# EAGLE board Evap-Lite V2.2 (EAGLE 9.5.2)
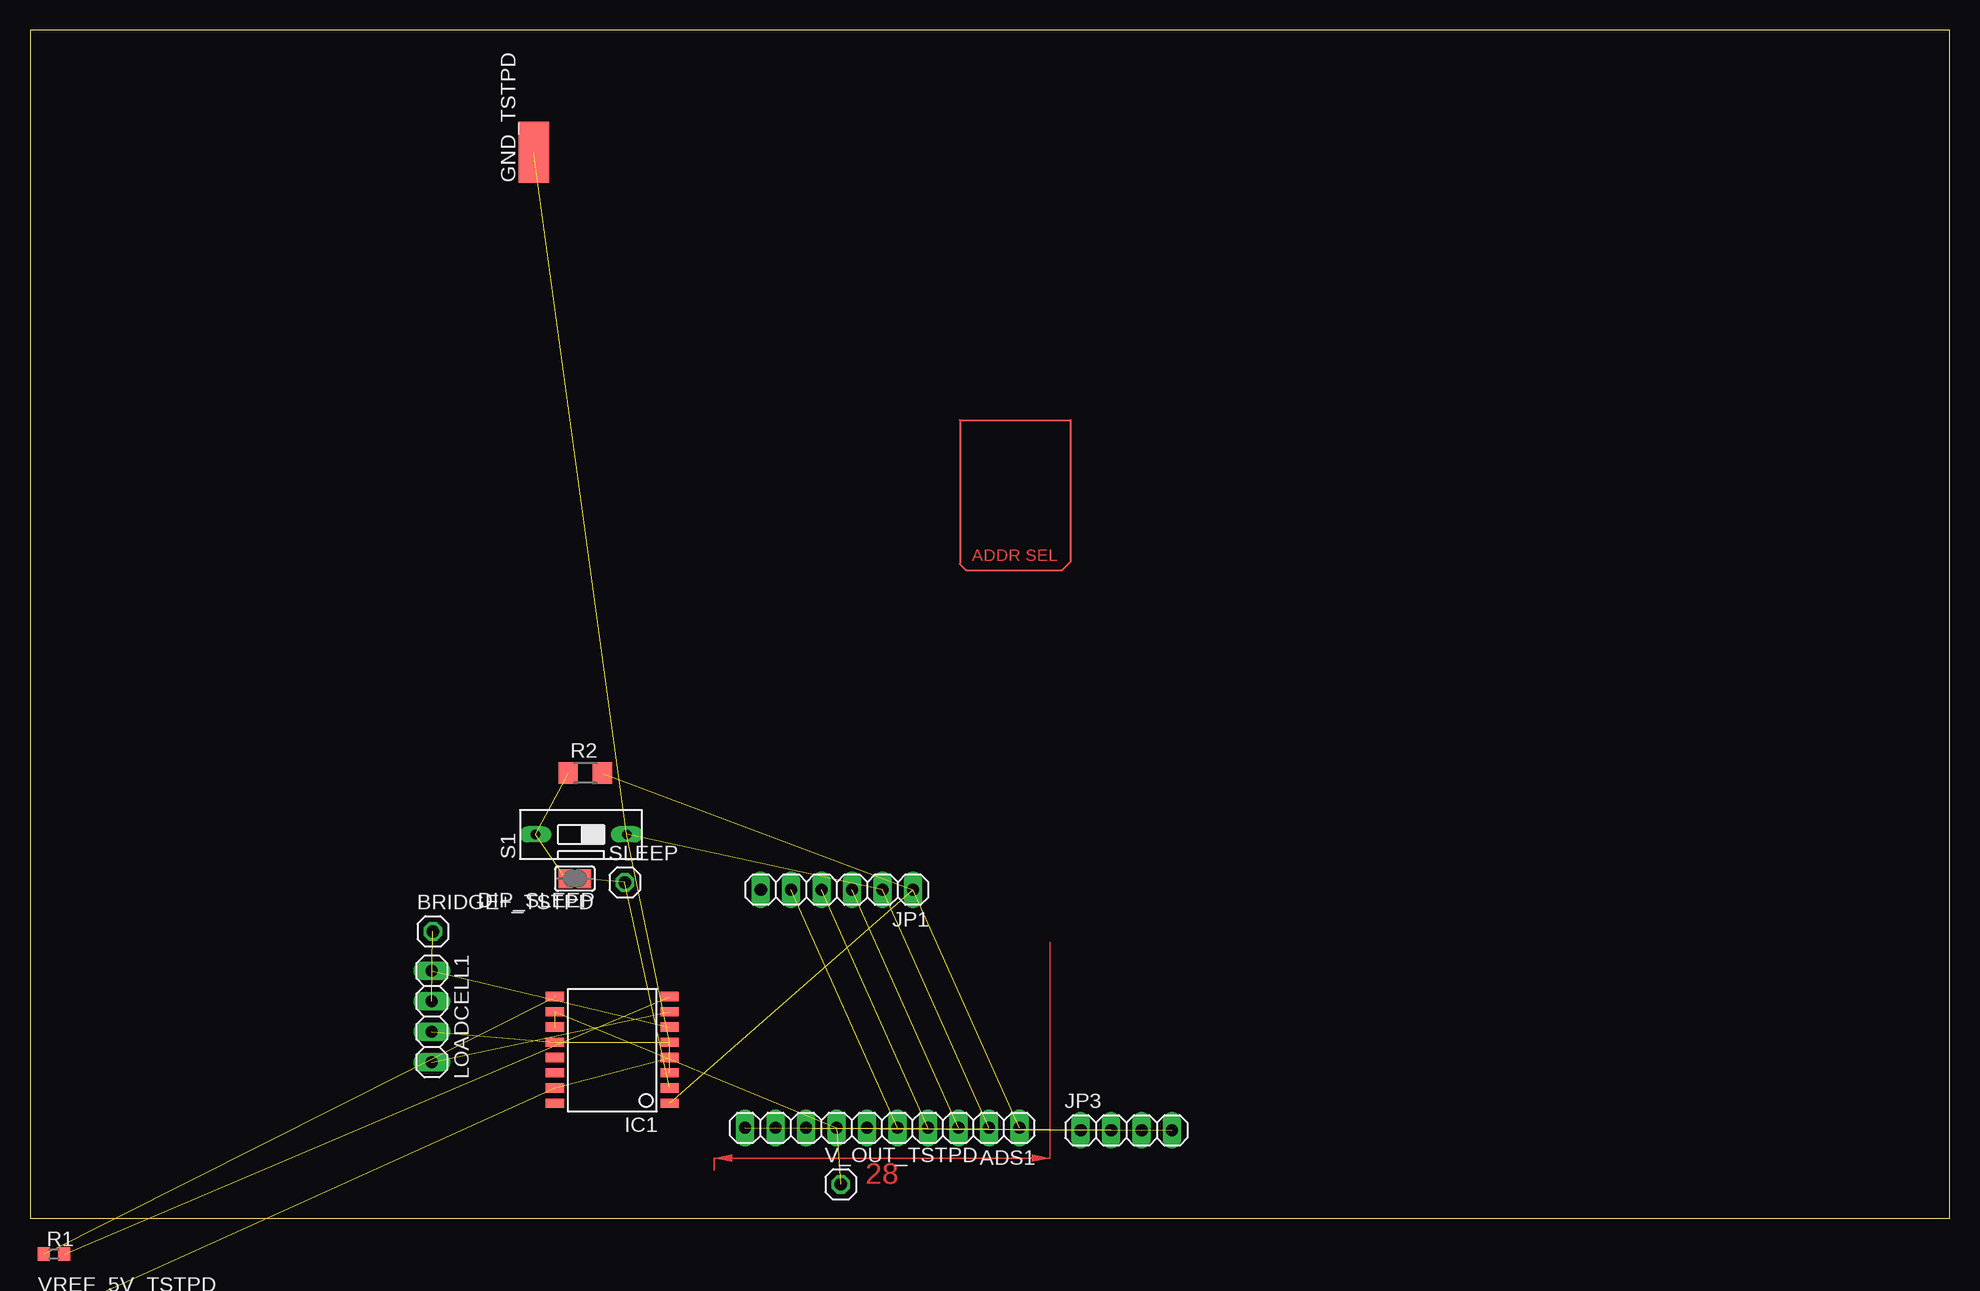
[diagram p0: board, top side]

Size 160 x 99 mm. Coordinates in mm from the lower left corner, seen from the top.
Outline: 0,0 160,0 160,99 0,99 0,0
Copper layers (1*16): Top 0.035mm / dielectric 1.5mm / Bottom 0.035mm
Design rules "default": minimum track width 6mil, minimum drill 0.35mm, track to track 6mil, track to pad 6mil, pad to pad 6mil, via to via 6mil, smd to smd 6mil, copper to edge 40mil, drill to drill 6mil, minimum pad ring 10mil, minimum via ring 8mil, stop-mask expansion 4mil, vias tented up to drill 0mil, thermal gap 10mil

## Footprints (pad centres in the part's own frame; a part is rotated, then mirrored left to right if it is on the bottom)
1X10 = drill 1.016 long: 1 -11.43,0; 2 -8.89,0; 3 -6.35,0; 4 -3.81,0; 5 -1.27,0; 6 1.27,0; 7 3.81,0; 8 6.35,0; 9 8.89,0; 10 11.43,0
1X01 = drill 1.016 octagon: 1 0,0
SJ = smd 1.168 x 1.6: 1 -0.762,0; 2 0.762,0
SMD2,54-5,08 = smd 2.54 x 5.08: 1 0,0
SO16-1 = smd 0.762 x 1.524: 1 -4.445,-4.775; 2 -3.175,-4.775; 3 -1.905,-4.775; 4 -0.635,-4.775; 5 0.635,-4.775; 6 1.905,-4.775; 7 3.175,-4.775; 8 4.445,-4.775; 9 4.445,4.775; 10 3.175,4.775; 11 1.905,4.775; 12 0.635,4.775; 13 -0.635,4.775; 14 -1.905,4.775; 15 -3.175,4.775; 16 -4.445,4.775
1X06 = drill 1.016 long: 1 -6.35,0; 2 -3.81,0; 3 -1.27,0; 4 1.27,0; 5 3.81,0; 6 6.35,0
1X04 = drill 1.016 long: 1 -3.81,0; 2 -1.27,0; 3 1.27,0; 4 3.81,0
R0603 = smd 1 x 1.1: 1 -0.85,0; 2 0.85,0
R1206 = smd 1.6 x 1.803: 1 -1.422,0; 2 1.422,0
DS-01 = drill 0.813 long: 1 0,-3.81; 2 0,3.81

## Placement (x,y rotation side)
ADS1  [1X10]  71.04,7.51 180 top
BRIDGE+_TSTPD  [1X01]  33.58,23.88 0 top
DIP_SLEEP  [SJ]  45.42,28.28 180 top
GND_TSTPD  WIREPADSMD2,54-5,08  [SMD2,54-5,08]  41.98,88.81 0 top
IC1  INA125U  [SO16-1]  48.53,14.01 90 top
JP1  [1X06]  67.26,27.36 180 top
JP3  [1X04]  91.39,7.31 0 top
LOADCELL1  [1X04]  33.49,16.79 270 top
R1  [R0603]  2,-3 0 top
R2  [R1206]  46.28,37.07 0 top
S1  [DS-01]  45.93,31.96 90 top
SLEEP  [1X01]  49.58,27.96 0 top
V_OUT_TSTPD  [1X01]  67.58,2.8 0 top
VREF_5V_TSTPD  [1X01]  2,-8 0 top  (outside the outline)

## Library data of the parts
ADS1 BRIDGE+_TSTPD JP1 JP3 LOADCELL1 SLEEP V_OUT_TSTPD VREF_5V_TSTPD = pinhead
DIP_SLEEP = jumper
GND_TSTPD = wirepad
IC1 = burr-brown; MF: TEXAS INSTRUMENT CONNECTORS; MPN: INA125U; OC_FARNELL: 1304375; OC_NEWARK: 80K5901
R1 R2 = rcl; SPICEPREFIX: R
S1 = switch-dil; OC_FARNELL: unknown; OC_NEWARK: unknown

## Nets
A1: ADS1.8 JP3.3
A2: ADS1.9 JP3.2
A3: ADS1.10 JP3.1
A+: IC1.6 LOADCELL1.1
A-: IC1.7 LOADCELL1.4
ADDR: ADS1.5 JP1.5
ALERT: ADS1.6 JP3.4
BRIDGE+: BRIDGE+_TSTPD.1 LOADCELL1.2
GND: ADS1.2 GND_TSTPD.1 IC1.3 IC1.5 IC1.12 JP1.2 LOADCELL1.3 S1.1
N$22: DIP_SLEEP.2 R2.1 S1.2
RG+: IC1.9 R1.1
RG-: IC1.8 R1.2
SCL: ADS1.3 JP1.3
SDA: ADS1.4 JP1.4
SLEEP: DIP_SLEEP.1 IC1.2 SLEEP.1
V_OUT: ADS1.7 IC1.10 IC1.11 V_OUT_TSTPD.1
V_SUPP: ADS1.1 IC1.1 JP1.1 R2.2
VREF_5V: IC1.4 IC1.15 VREF_5V_TSTPD.1

## Tracks (layer width: path | path; a pad name or v marks a point on that pad's centre or on a via)
A1  (1 unrouted)
A2  (1 unrouted)
A3  (1 unrouted)
A+  (1 unrouted)
A-  (1 unrouted)
ADDR  (1 unrouted)
ALERT  (1 unrouted)
BRIDGE+  (1 unrouted)
GND  (7 unrouted)
N$22  (2 unrouted)
RG+  (1 unrouted)
RG-  (1 unrouted)
  Top 0.152: 77.5,66.5 77.5,54.5 78,54 86,54 86.75,54.75 86.75,66.5 77.5,66.5
SCL  (1 unrouted)
SDA  (1 unrouted)
SLEEP  (2 unrouted)
V_OUT  (3 unrouted)
V_SUPP  (3 unrouted)
VREF_5V  (2 unrouted)
(copper drawn outside any net)
  shapes: Top area x2

## Text on the board
Top: ADDR SEL